# Altium PCB XPIMU_1V1.PCBDOC (part 1 of 3)
Units mil, origin at the board's own origin, x right, y up, seen from the top; angles counter-clockwise.
Board outline 1578.8 x 1145.73 mil, 6 copper layers (Top Layer, Internal Plane 1, Mid-Layer 1, Mid-Layer 2, Mid-Layer 3, Bottom Layer); 139 components, 101 nets, 532 pads, 256 vias.
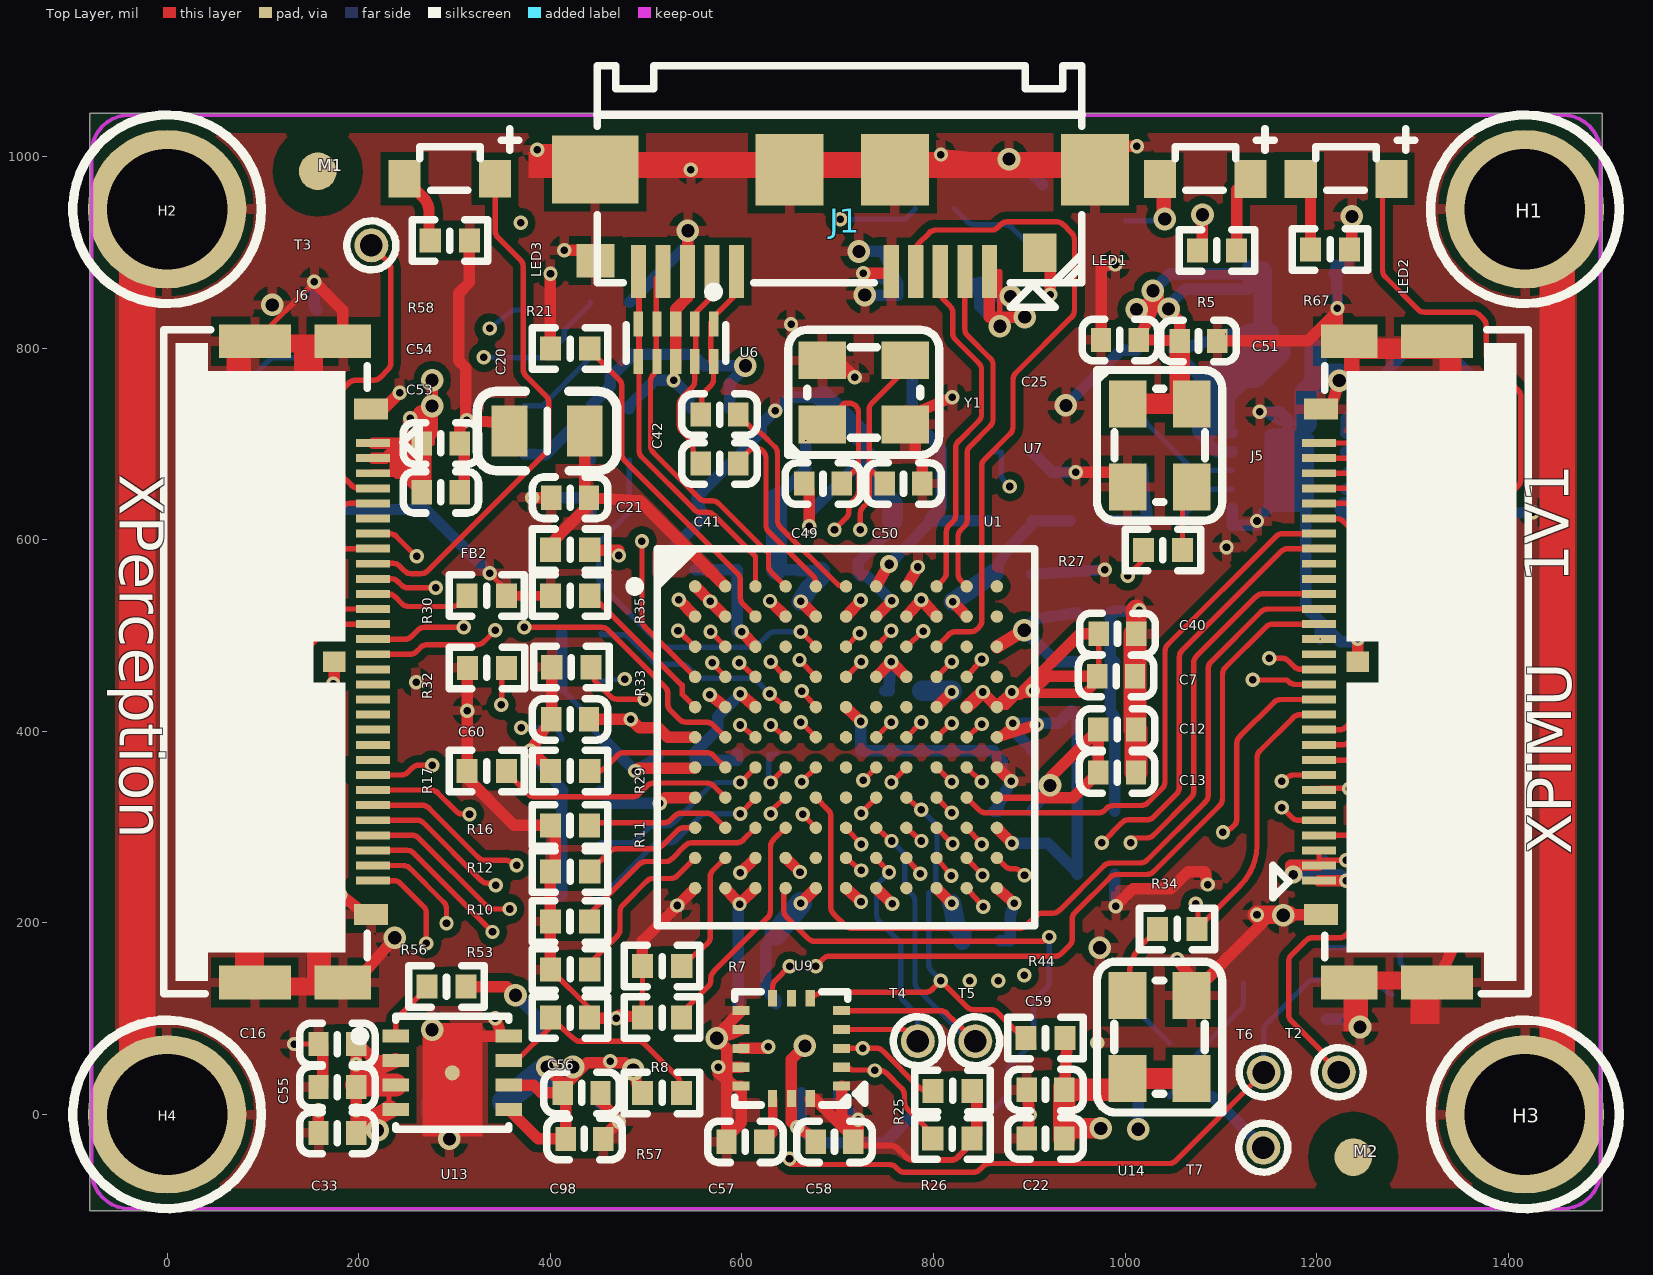
[diagram p0: Top Layer view]
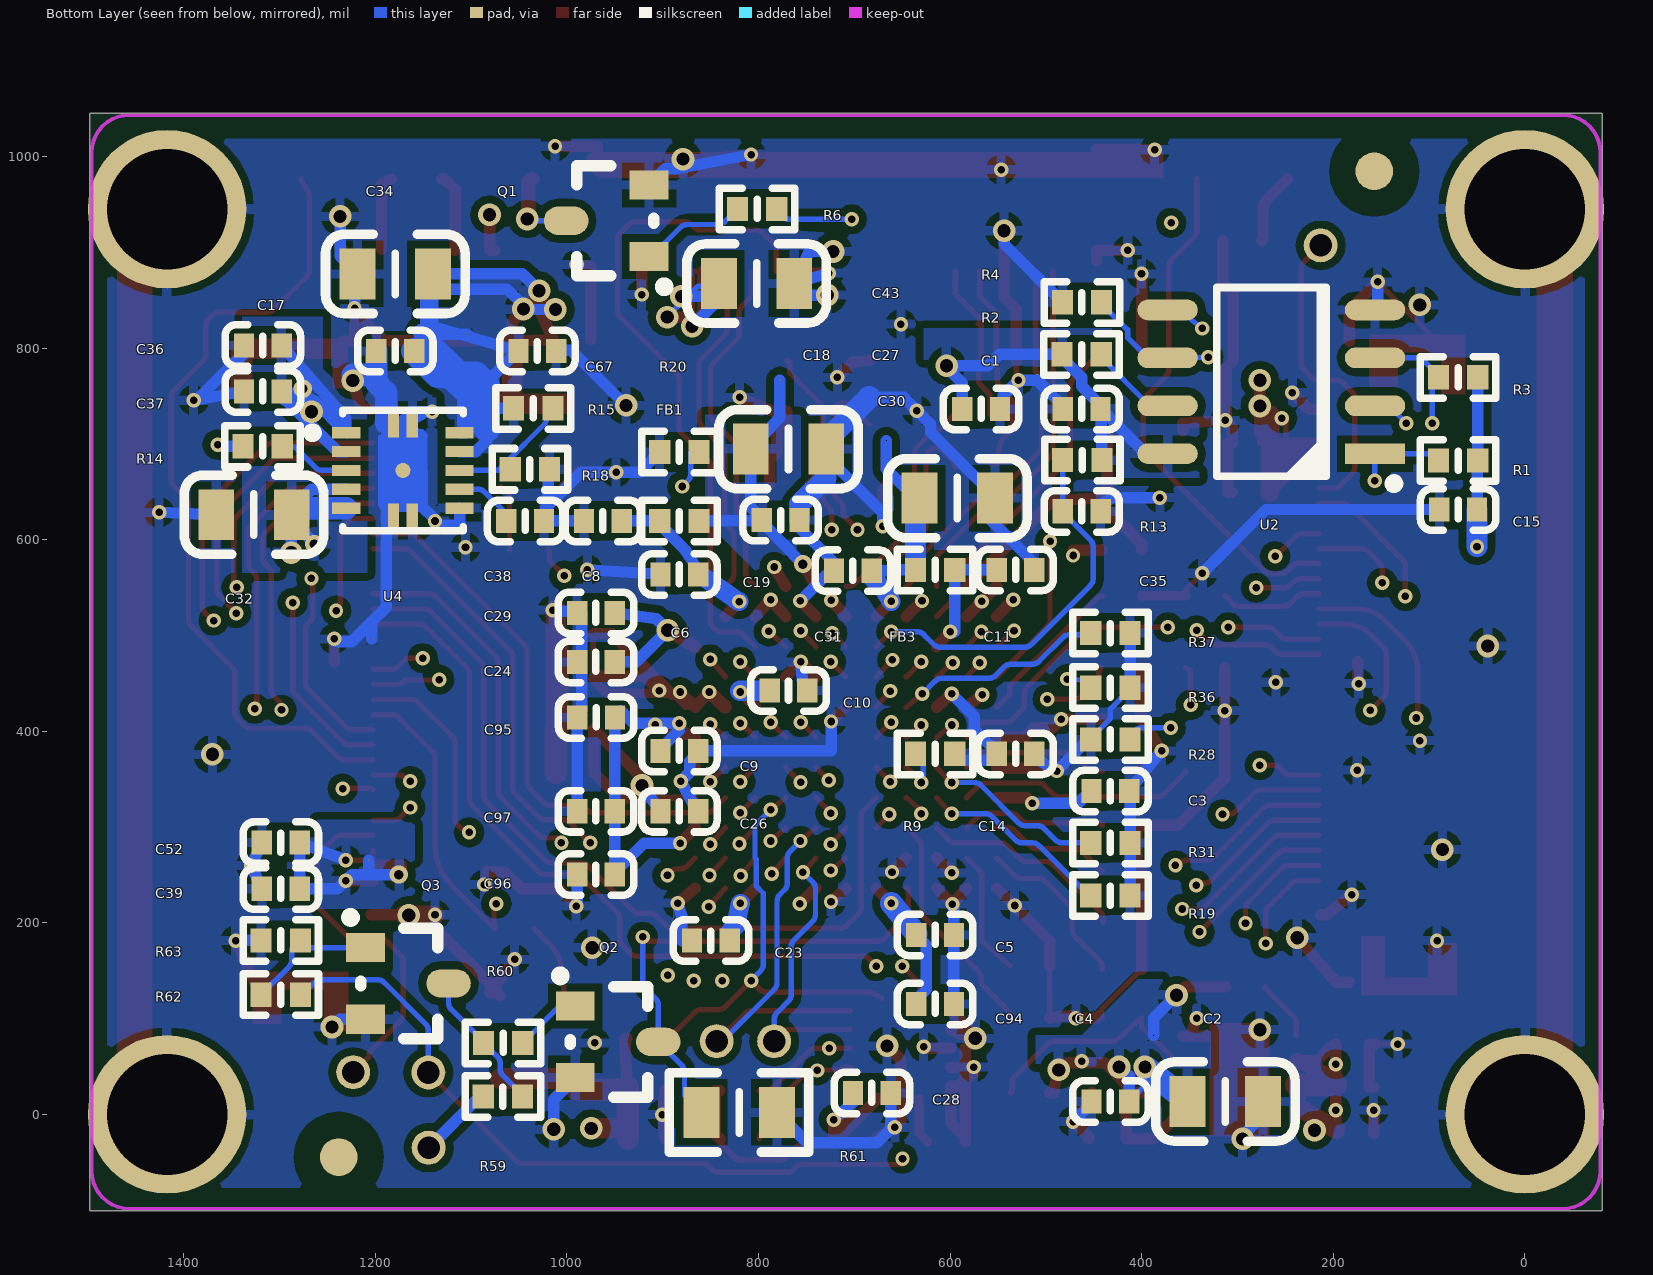
[diagram p1: Bottom Layer view, seen from below]
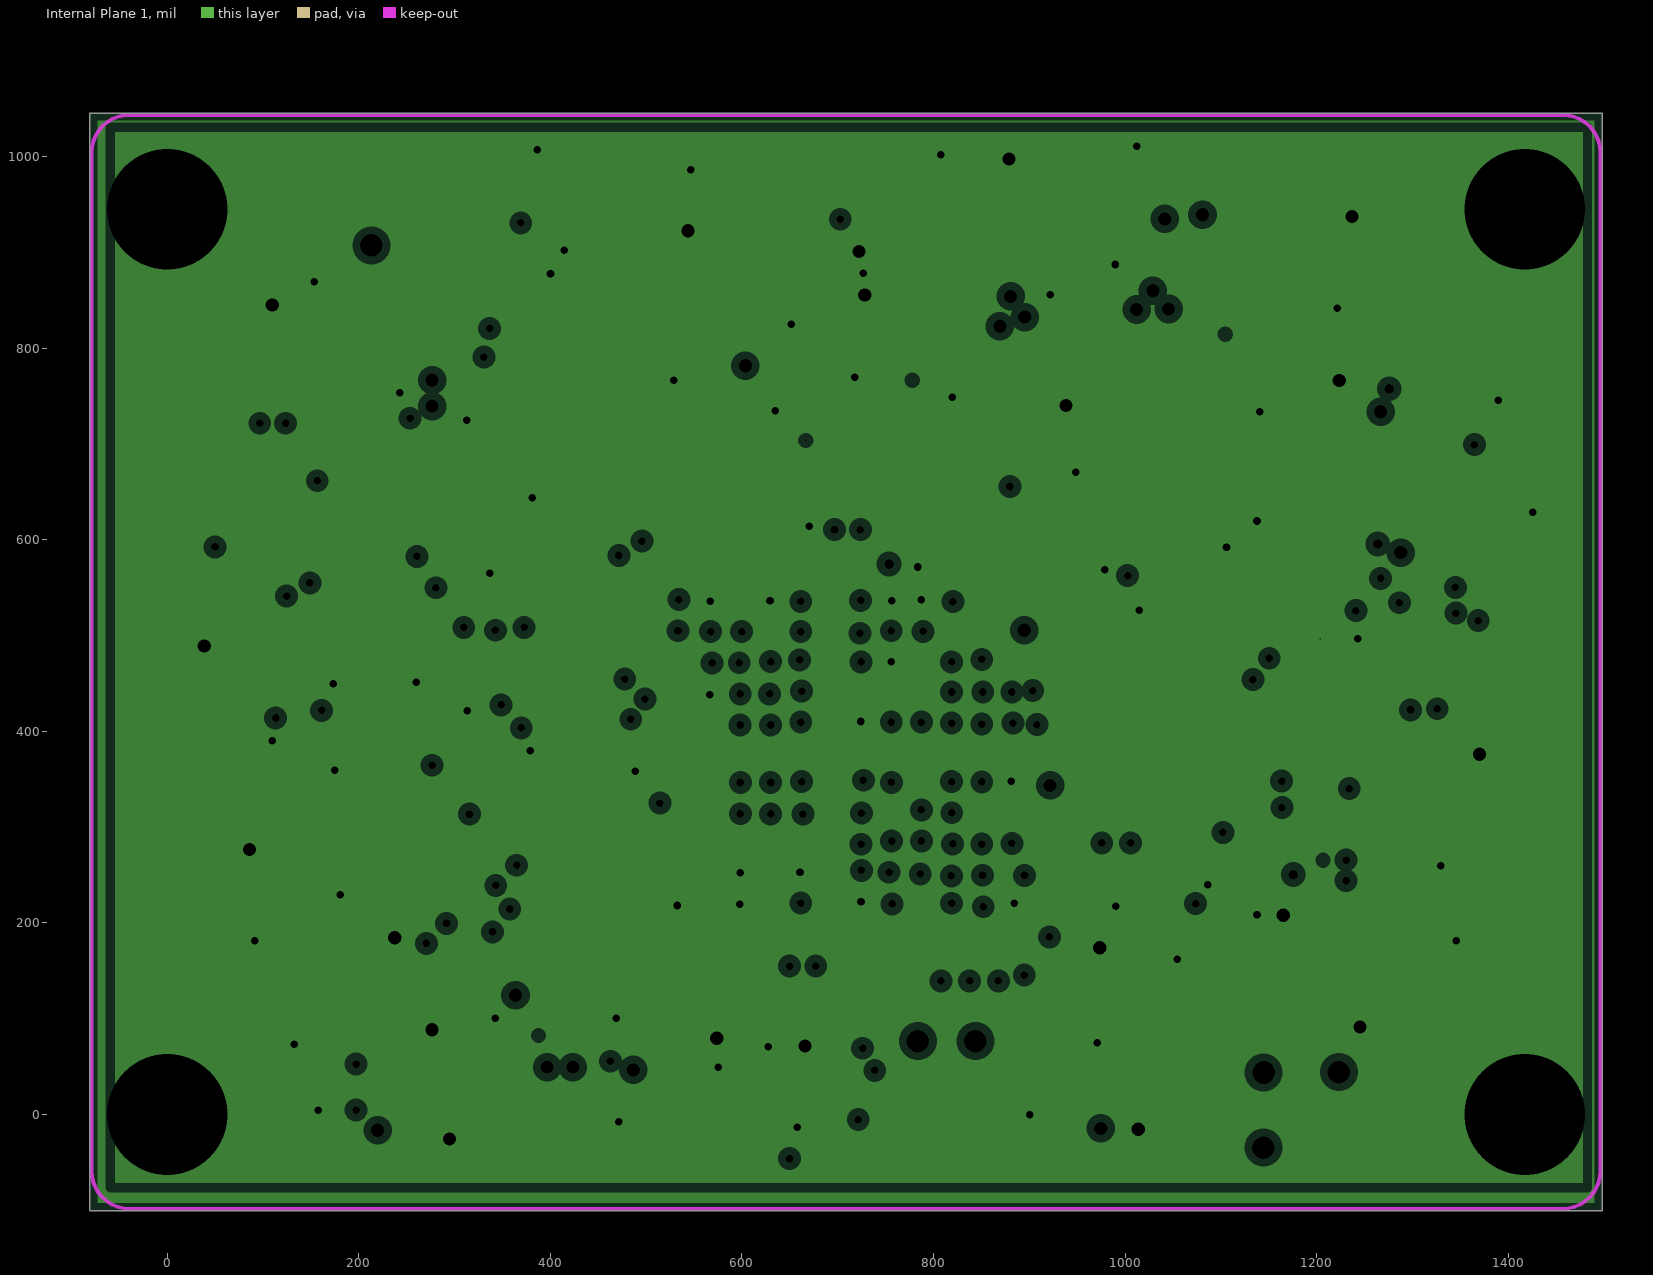
[diagram p2: Internal Plane 1, clearances drawn from the general rule]
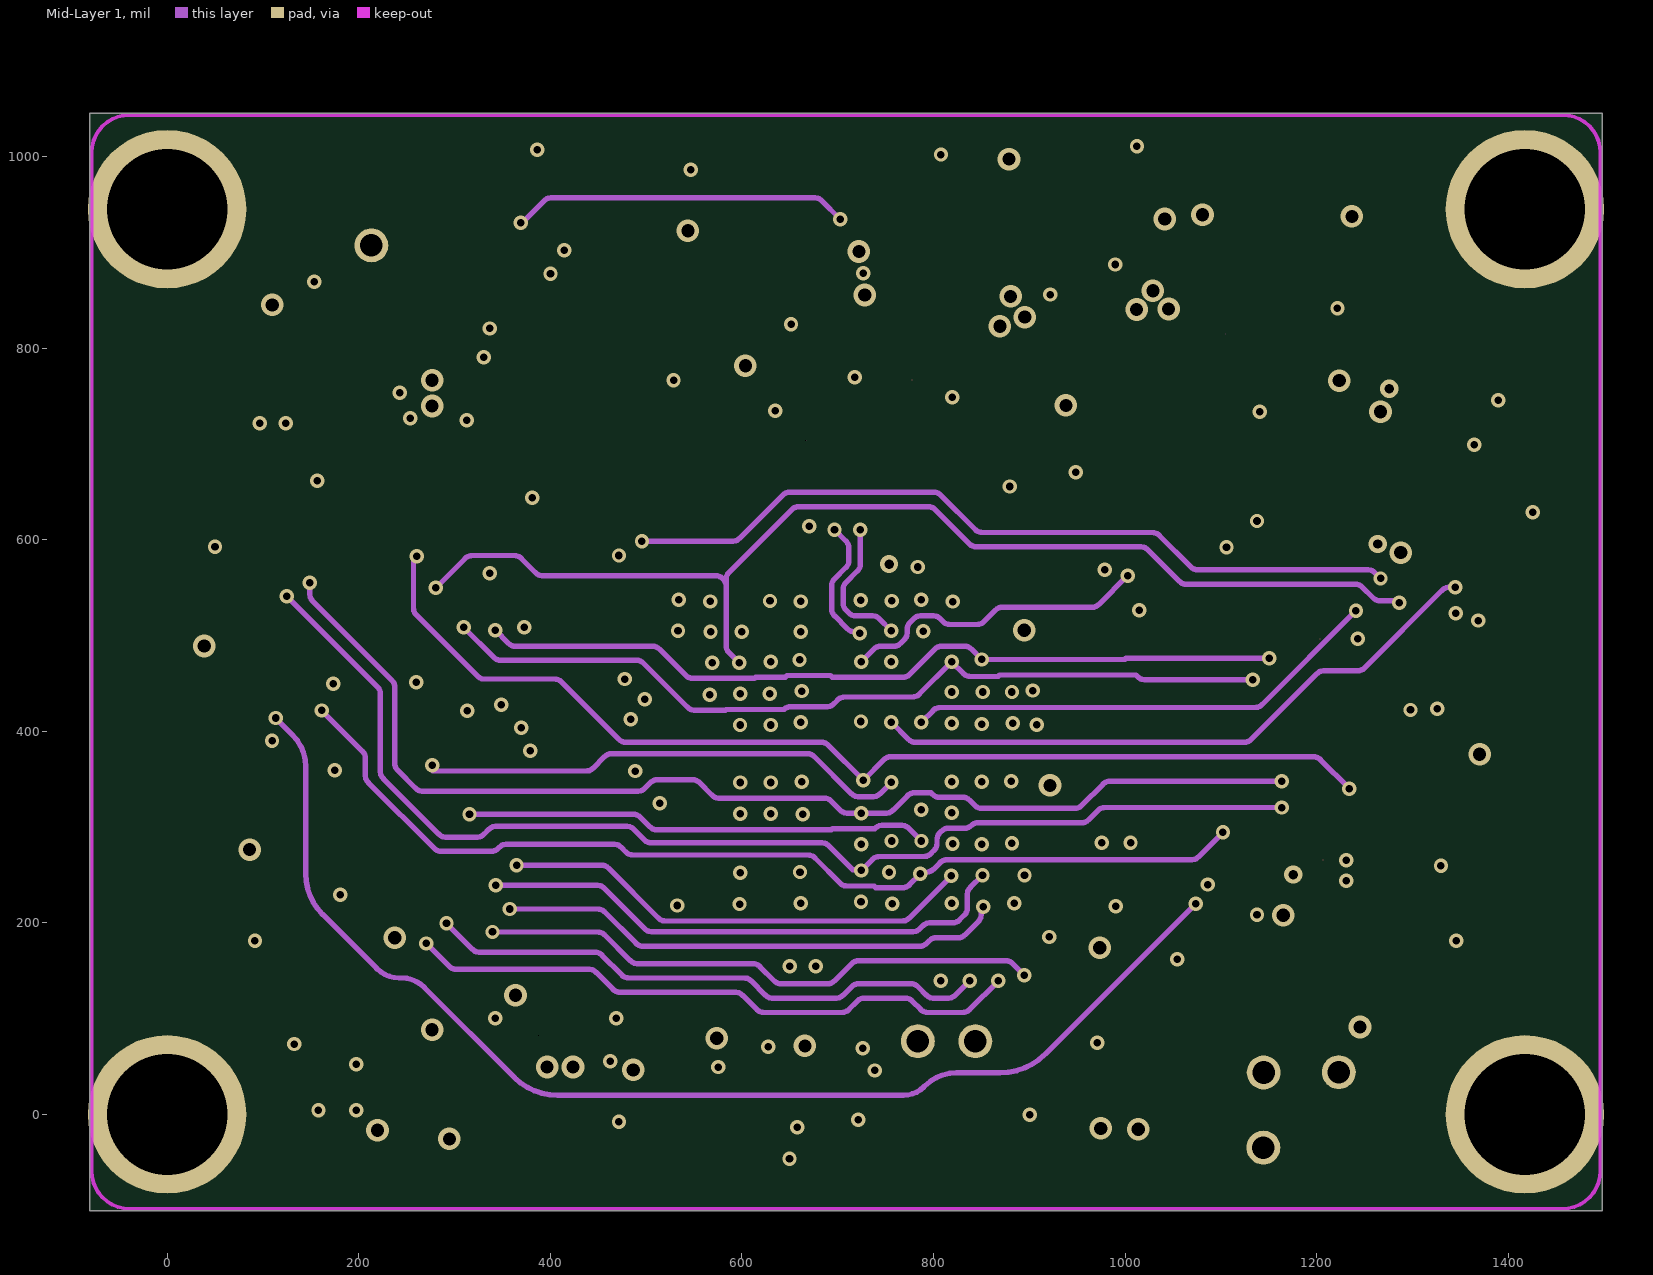
[diagram p3: Mid-Layer 1]
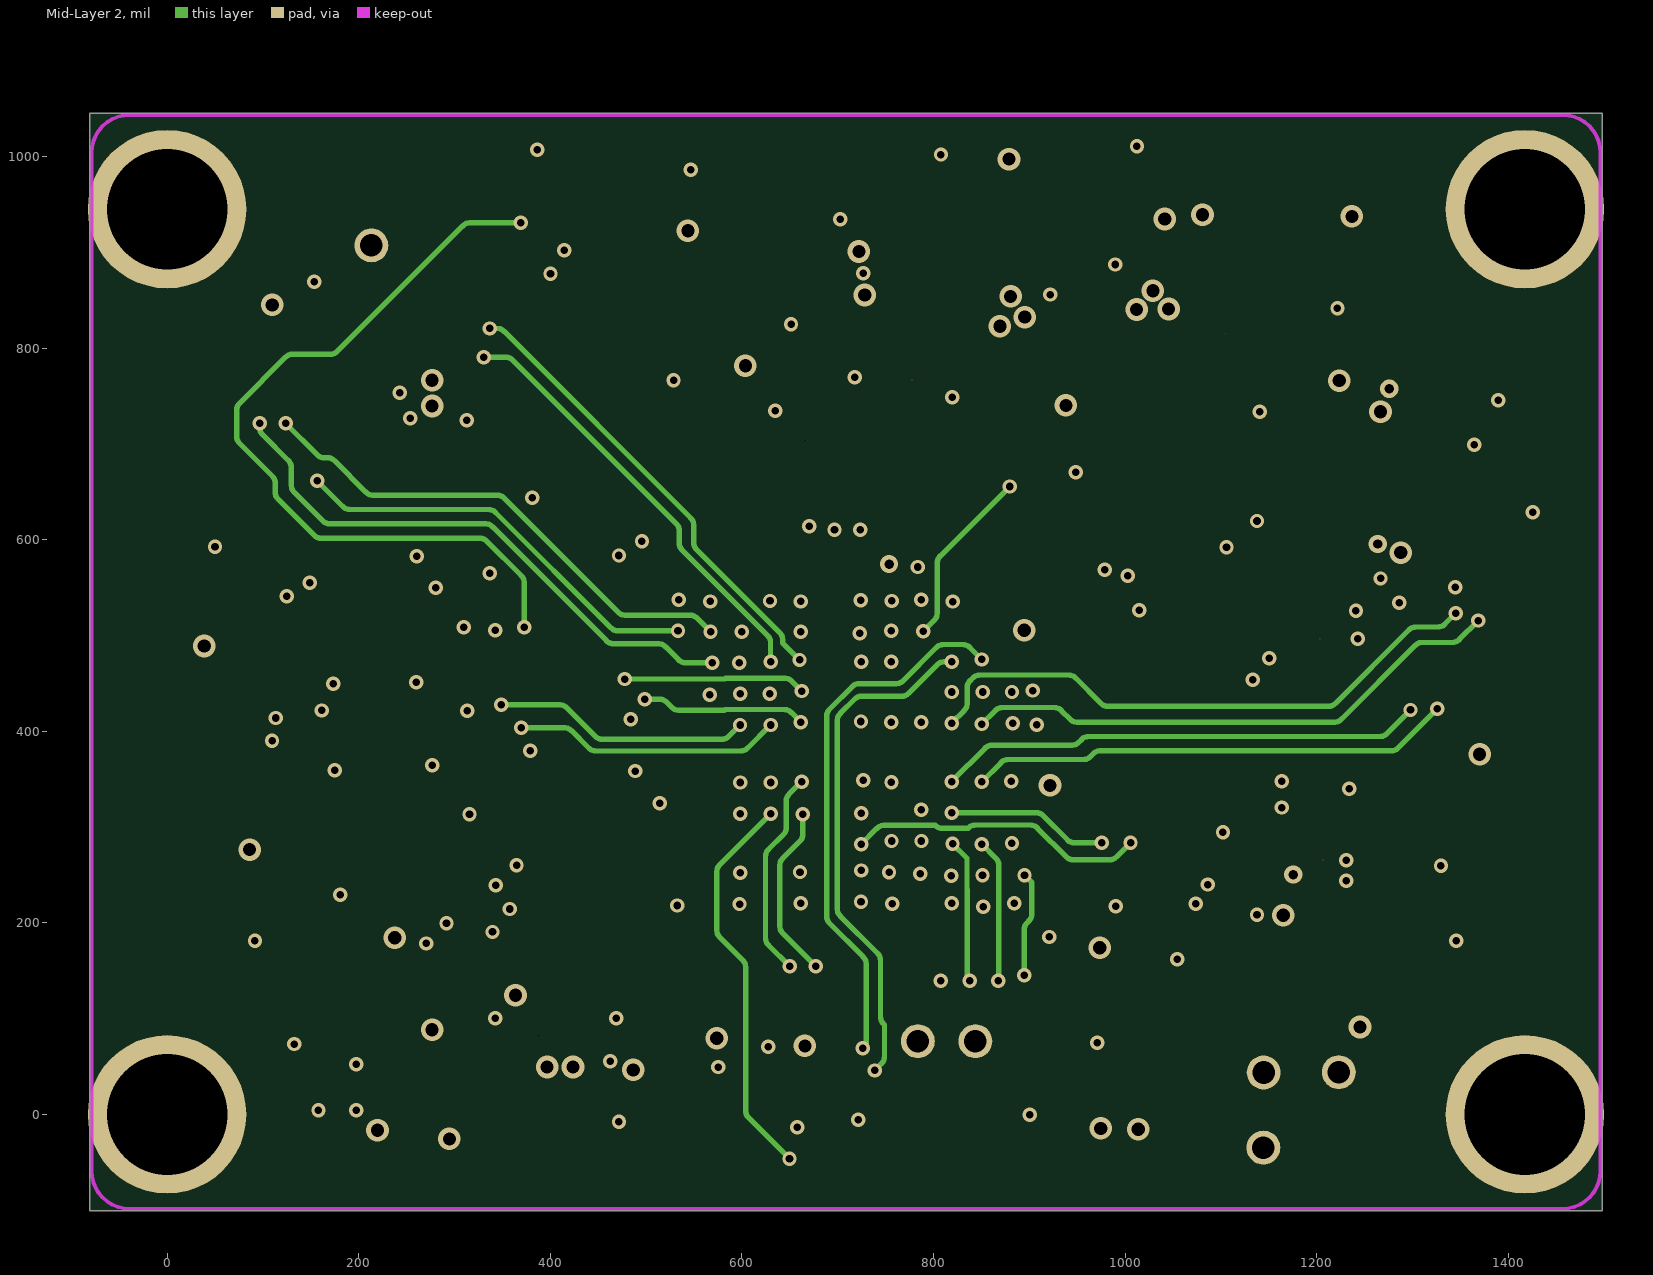
[diagram p4: Mid-Layer 2]
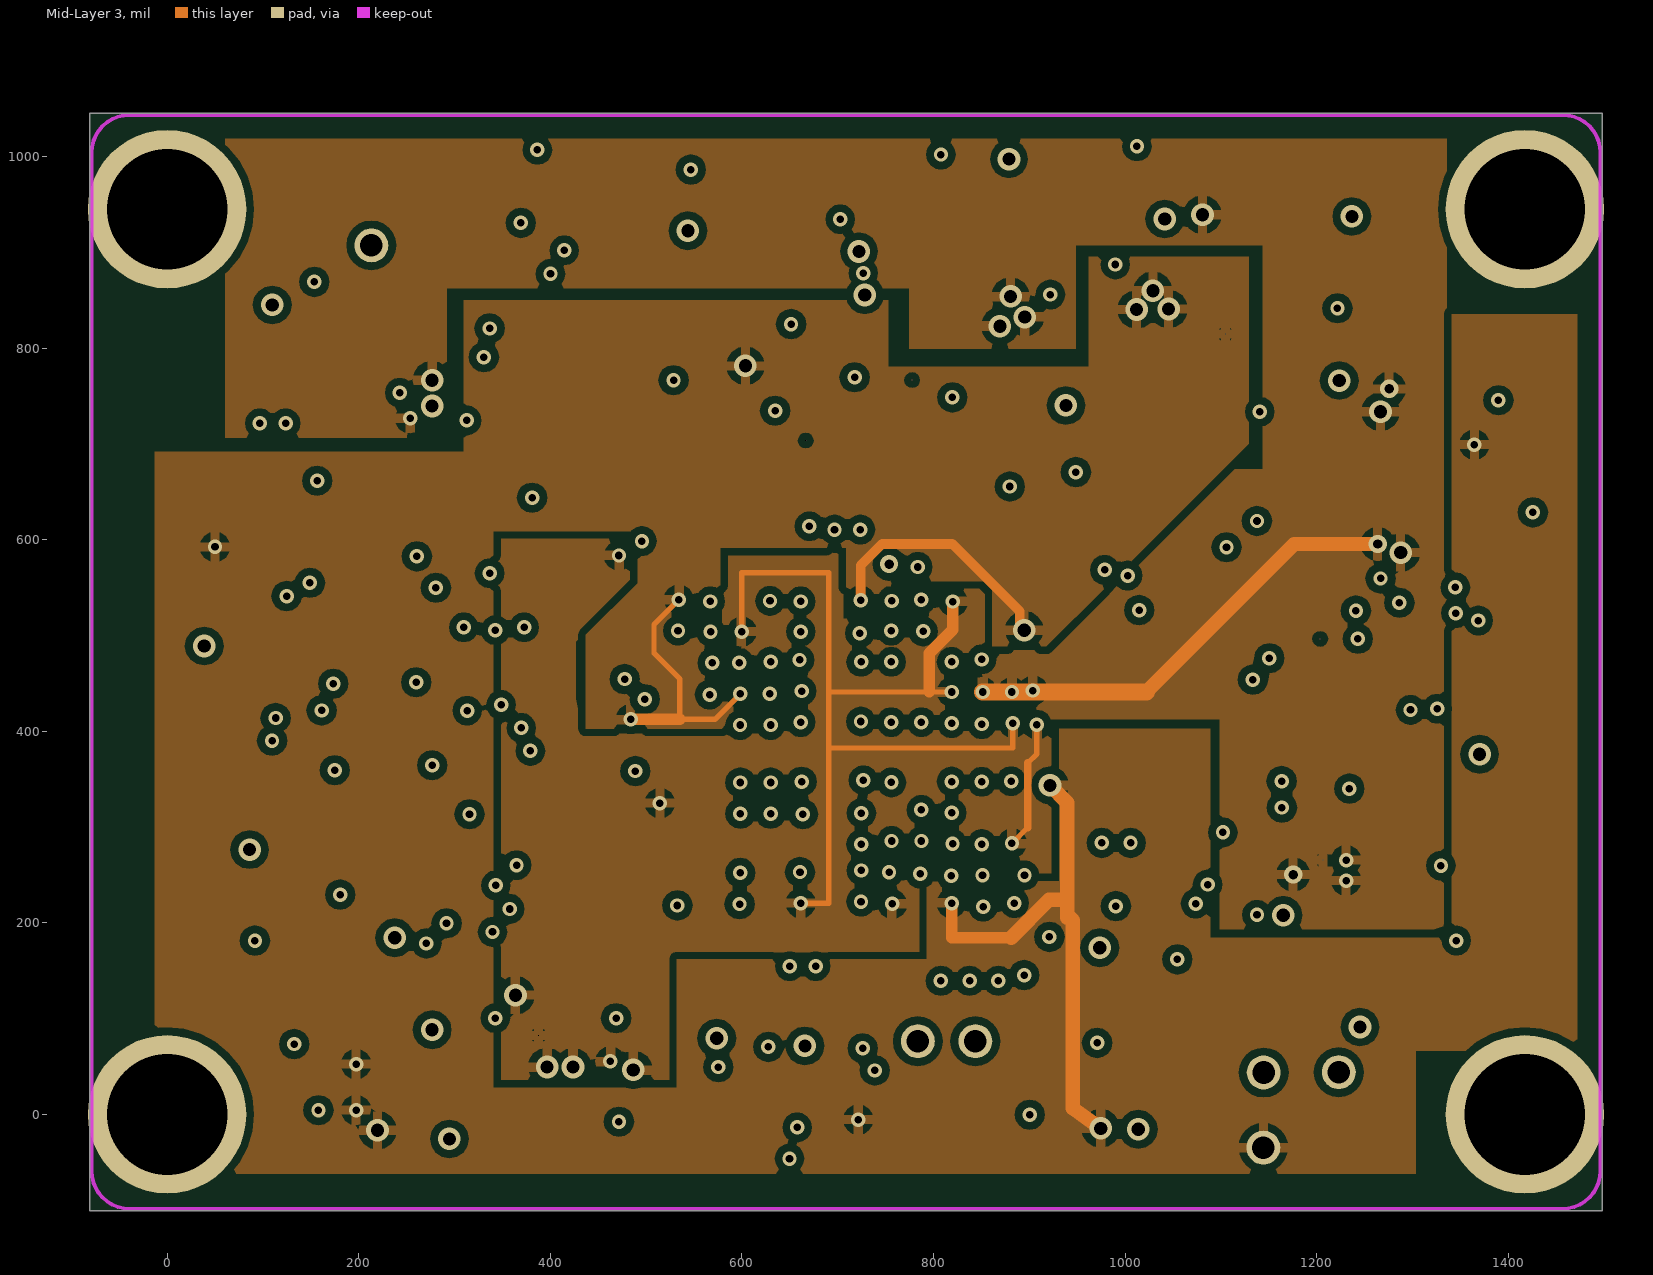
[diagram p5: Mid-Layer 3]

## Layer stack, top to bottom
Top Layer: signal copper 1.4
Dielectric: dielectric 12.6, FR-4, Dk 4.8
Internal Plane 1: plane copper 1.4
Dielectric: dielectric 12.6, FR-4, Dk 4.8
Mid-Layer 1: signal copper 1.4
Dielectric: dielectric 12.6, FR-4, Dk 4.8
Mid-Layer 2: signal copper 1.4
Dielectric: dielectric 12.6, FR-4, Dk 4.8
Mid-Layer 3: signal copper 1.4
Dielectric: dielectric 12.6, FR-4, Dk 4.8
Bottom Layer: signal copper 1.4

## Board outline
-80.74,-100.43 1498.06,-100.43 1498.06,1045.31 -80.74,1045.31

## Design rules (kind name [scope] priority, off if disabled: settings)
Clearance "'Default' PADS rule_9" [All] p1: gap=8
Clearance "'Default' PADS rule_8" [InPolygon vs InPolygon] p2: gap=8
Clearance "'Default' PADS rule_7" [All] p3: gap=5.5
Clearance "'Default' PADS rule_4" [IsVia vs IsVia] p4: gap=6
ComponentClearance "'Default' PADS rule" [All] p1: gap=10 collisioncheckmode=3 verticalgap=10 showdistances=FALSE
PlaneClearance "'Default' PADS rule_3" [All] p1: clearance=8
PlaneConnect "Power Plane Connect Style - pads with no thermal" [(Name='J5-31') Or (Name='J5-32') Or (Name='J6-31') Or (Name='J6-32') Or (Name='M1-1') Or (Name='M2-1') Or (Name='U1-FID1') Or (Name='U1-FID2')] p1: planeconnectstyle=NoConnect reliefexpansion=20 reliefentries=4 reliefconductorwidth=10 reliefairgap=10 // PAD - No Thermal Connect Rule
PlaneConnect "Power Plane Connect Style - from global settings" [All] p2: planeconnectstyle=Relief reliefexpansion=20 reliefentries=2 reliefconductorwidth=11.81 reliefairgap=10
PolygonConnect [All] p1: connectstyle=Relief reliefconductorwidth=10 reliefentries=4 polygonreliefangle="90 Angle"
RoutingVias [All] p1: holewidth=28 width=50 viastyle="Through Hole" minholewidth=28 minwidth=50 maxholewidth=28 maxwidth=50
SMDToCorner "'Default' PADS rule_5" [All] p1: distance=60000
SMDToPlane "'Default' PADS rule_6" [All] p1: distance=60000
SilkscreenOverComponentPads [All] p1: minsilkscreentomaskgap=10
SolderMaskExpansion [All] p1: expansion=4
Width "'Default' PADS rule_2" [All] p1: maxlimit=250 minlimit=5 preferedwidth=5.6
24 further rules are at their usual default settings.

## Components (designator, comment, footprint, x,y, rotation, side; value= is the part's Value field where it differs from the comment)
C1 "0402C_L" 0402C_L 462.66,736.44 r180 bottom
C2 "0805C" 0805C 312.66,13.44 r180 bottom
C3 "0402C_L" 0402C_L 432.66,337.44 r0 bottom
C4 "0402C_L" 0402C_L 432.66,13.44 r180 bottom
C5 "0402C_L" 0402C_L 615.66,187.44 r0 bottom
C6 "0402C_L" 0402C_L 882.65,563.78 r180 bottom
C7 "0402C_L" 0402C_L 990.66,457.44 r180 top
C8 "0402C_L" 0402C_L 962.53,619.44 r180 bottom
C9 "0402C_L" 0402C_L 882.66,379.44 r0 bottom
C10 "0402C_L" 0402C_L 768.66,442.44 r0 bottom
C11 "0402C_L" 0402C_L 531.66,568.44 r0 bottom
C12 "0402C_L" 0402C_L 991.65,401.84 r180 top
C13 "0402C_L" 0402C_L 991.65,356.84 r180 top
C14 "0402C_L" 0402C_L 531.66,376.44 r0 bottom
C15 "0402C_L" 0402C_L 69.66,631.44 r180 bottom
C16 "0402C_L" 0402C_L 177.66,73.44 r0 top
C17 "0402C_L" 0402C_L 1179.16,796.91 r180 bottom
C18 "0805C" 0805C 768.66,694.44 r180 bottom
C19 "0402C_L" 0402C_L 776.84,620.39 r0 bottom
C20 "0805C" 0805C 396.65,713.43 r180 top
C21 "0402C_L" 0402C_L 420.66,643.7 r0 top
C22 "0402C_L" 0402C_L 916.91,-25.22 r0 top
C23 "0402C_L" 0402C_L 849.66,181.44 r180 bottom
C24 "0402C_L" 0402C_L 969.66,472.44 r180 bottom
C25 "0402C_L" 0402C_L 994.56,808.44 r0 top
C26 "0402C_L" 0402C_L 882.66,316.44 r0 bottom
C27 "0402C_L" 0402C_L 567.66,736.44 r0 bottom
C28 "0402C_L" 0402C_L 681.66,22.44 r0 bottom
C29 "0402C_L" 0402C_L 969.66,523.53 r180 bottom
C30 "0805C" 0805C 592.44,643.25 r180 bottom
C31 "0402C_L" 0402C_L 701.56,567.54 r180 bottom
C32 "0805C" 0805C 1326.66,625.98 r0 bottom
C33 "0402C_L" 0402C_L 177.66,-19.56 r0 top
C34 "0805C" 0805C 1179.16,877.4 r180 bottom
C35 "0402C_L" 0402C_L 462.57,629.56 r0 bottom
C36 "0402C_L" 0402C_L 1317.39,802.67 r0 bottom
C37 "0402C_L" 0402C_L 1317.39,754.67 r180 bottom
C38 "0402C_L" 0402C_L 1043.6,619.44 r0 bottom
C39 "0402C_L" 0402C_L 1298.67,235.6 r180 bottom
C40 "0402C_L" 0402C_L 992.07,501.69 r0 top
C41 "0402C_L" 0402C_L 576.66,679.44 r180 top
C42 "0402C_L" 0402C_L 576.66,730.44 r180 top
C43 "0805C" 0805C 802.01,867.43 r0 bottom
C49 "0402C_L" 0402C_L 684.66,658.44 r0 top
C50 "0402C_L" 0402C_L 768.66,658.44 r0 top
C51 "0402C_L" 0402C_L 1076.64,807.38 r180 top
C52 "0402C_L" 0402C_L 1298.67,283.74 r180 bottom
C53 "0402C_L" 0402C_L 285.66,649.44 r180 top
C54 "0402C_L" 0402C_L 285.66,700.44 r180 top
C55 "0402C_L" 0402C_L 177.66,28.44 r180 top
C56 "0402C_L" 0402C_L 432.66,22.44 r0 top
C57 "0402C_L" 0402C_L 603.66,-28.56 r0 top
C58 "0402C_L" 0402C_L 696.66,-28.56 r0 top
C59 "0402C_L" 0402C_L 916.91,25.71 r0 top
C60 "0402C_L" 0402C_L 420.66,412.44 r0 top
C67 "0402C_L" 0402C_L 1030.89,796.91 r0 bottom
C94 "0402C_L" 0402C_L 615.66,115.44 r0 bottom
C95 "0402C_L" 0402C_L 969.5,414.44 r180 bottom
C96 "0402C_L" 0402C_L 969.66,250.44 r180 bottom
C97 "0402C_L" 0402C_L 969.66,316.44 r180 bottom
C98 "0402C_L" 0402C_L 435.66,-25.56 r180 top
FB1 "0402R_L" 0402R_L 882.66,619.44 r0 bottom
FB2 "0402R_L" 0402R_L 420.66,589.44 r0 top
FB3 "0402R_L" 0402R_L 615.66,568.44 r180 bottom
H1 "PAD_M3_D350_450" PAD_M3_D350_450 1417.32,944.88 r0 top
H2 "PAD_M3_D350_450" PAD_M3_D350_450 0,944.88 r0 top
H3 "PAD_M3_D350_450" PAD_M3_D350_450 1417.32,0 r0 top
H4 "PAD_M3_D350_450" PAD_M3_D350_450 0,0 r0 top
J1 "USB3_BA_P65L130W51H28" USB3_BA_P65L130W51H28 807.09,1043.31 r180 top
J5 "HSA30_P40L196W42H10_20525" HSA30_P40L196W42H10_20525 1260.66,472.44 r90 top
J6 "HSA30_P40L196W42H10_20525" HSA30_P40L196W42H10_20525 156.66,472.44 r270 top
LED1 "LED0805A_L210W100H60" LED0805A_L210W100H60 1083.56,976.47 r0 top
LED2 "LED0805A_L210W100H60" LED0805A_L210W100H60 1230.62,976.47 r0 top
LED3 "LED0805A_L210W100H60" LED0805A_L210W100H60 295.14,976.56 r0 top
M1 "PAD_MARK_D1-2" PAD_MARK_D1-2 157.25,984.5 r0 top
M2 "PAD_MARK_D1-2" PAD_MARK_D1-2 1238.18,-44.6 r0 top
Q1 "SOT-23L" SOT-23L 955.53,932.84 r0 bottom
Q2 "SOT-23L" SOT-23L 949.91,75.74 r180 bottom
Q3 "SOT-23L" SOT-23L 1168.82,136.73 r180 bottom
R1 "0402R_L" 0402R_L 69.66,682.44 r0 bottom
R2 "0402R_L" 0402R_L 462.66,793.44 r0 bottom
R3 "0402R_L" 0402R_L 69.66,769.44 r0 bottom
R4 "0402R_L" 0402R_L 462.36,847.73 r180 bottom
R5 "0402R_L" 0402R_L 1095.85,901.9 r0 top
R6 "0402R_L" 0402R_L 801.48,945.27 r0 bottom
R7 "0402R_L" 0402R_L 516.69,154.86 r180 top
R8 "0402R_L" 0402R_L 516.63,101.11 r180 top
R9 "0402R_L" 0402R_L 615.66,376.44 r0 bottom
R10 "0402R_L" 0402R_L 420.66,151.44 r180 top
R11 "0402R_L" 0402R_L 420.56,301.58 r180 top
R12 "0402R_L" 0402R_L 420.56,201.4 r180 top
R13 "0402R_L" 0402R_L 462.04,683.05 r0 bottom
R14 "0402R_L" 0402R_L 1317.66,697.44 r180 bottom
R15 "0402R_L" 0402R_L 1035.12,737.07 r180 bottom
R16 "0402R_L" 0402R_L 420.66,253.44 r180 top
R17 "0402R_L" 0402R_L 333.66,358.44 r180 top
R18 "0402R_L" 0402R_L 1038.66,673.44 r180 bottom
R19 "0402R_L" 0402R_L 432.66,228.35 r180 bottom
R20 "0402R_L" 0402R_L 882.66,691.44 r0 bottom
R21 "0402R_L" 0402R_L 420.66,799.44 r180 top
R25 "0402R_L" 0402R_L 819.93,24.54 r180 top
R26 "0402R_L" 0402R_L 819.67,-25.23 r180 top
R27 "0402R_L" 0402R_L 1039.48,589.04 r0 top
R28 "0402R_L" 0402R_L 432.66,391.44 r0 bottom
R29 "0402R_L" 0402R_L 420.66,358.44 r180 top
R30 "0402R_L" 0402R_L 333.66,541.44 r0 top
R31 "0402R_L" 0402R_L 432.66,283.46 r180 bottom
R32 "0402R_L" 0402R_L 333.88,466.18 r180 top
R33 "0402R_L" 0402R_L 422.02,466.84 r180 top
R34 "0402R_L" 0402R_L 1054.39,193.72 r180 top
R35 "0402R_L" 0402R_L 420.66,541.44 r180 top
R36 "0402R_L" 0402R_L 432.66,445.44 r180 bottom
R37 "0402R_L" 0402R_L 432.66,502.44 r180 bottom
R44 "0402R_L" 0402R_L 916.91,79.71 r0 top
R53 "0402R_L" 0402R_L 420.63,101.11 r0 top
R56 "0402R_L" 0402R_L 291.66,133.44 r180 top
R57 "0402R_L" 0402R_L 516.66,22.44 r0 top
R58 "0402R_L" 0402R_L 295.14,912.09 r180 top
R59 "0402R_L" 0402R_L 1066.89,18.62 r0 bottom
R60 "0402R_L" 0402R_L 1066.56,74.61 r0 bottom
R61 "0805R" 0805R 820.17,2.13 r0 bottom
R62 "0402R_L" 0402R_L 1298.67,124.97 r0 bottom
R63 "0402R_L" 0402R_L 1298.67,181.63 r180 bottom
R67 "0402R_L" 0402R_L 1213.94,902.96 r180 top
T2 "PAD_TP_D1.2" PAD_TP_D1.2 1223.05,44.09 r0 top
T3 "PAD_TP_D1.2" PAD_TP_D1.2 213.23,907.1 r0 top
T4 "PAD_TP_D1.2" PAD_TP_D1.2 783.66,76.44 r0 top
T5 "PAD_TP_D1.2" PAD_TP_D1.2 843.66,76.44 r0 top
T6 "PAD_TP_D1.2" PAD_TP_D1.2 1144.65,43.75 r0 top
T7 "PAD_TP_D1.2" PAD_TP_D1.2 1144.31,-34.65 r0 top
U1 "FBGA121_P80L100W100H11" FBGA121_P80L100W100H11 708.66,393.7 r0 top
U2 "SO8N_P127L50W40W62H17" SO8N_P127L50W40W62H17 264.66,764.74 r0 bottom
U4 "SON10_P50L32W32H10_DRC" SON10_P50L32W32H10_DRC 1171.16,672.24 r180 bottom
U6 "UDFN10_SON_P50L25W10H55" UDFN10_SON_P50L25W10H55 531.06,805.44 r270 top
U7 "XTAL_3225" XTAL_3225 1036.1,698.39 r270 top
U9 "LGA16_P50L30W30H08" LGA16_P50L30W30H08 651.66,68.9 r180 top
U13 "TDFN8_P65L30W30H08" TDFN8_P65L30W30H08 297.66,43.44 r0 top
U14 "XTAL_3225" XTAL_3225 1035.93,80.71 r90 top
Y1 "XTAL_3225" XTAL_3225 727.16,753.64 r0 top

## Footprints (in the part's own frame and the unit in brackets; to place one, negate y for a bottom-side part, rotate by r counter-clockwise, add the part's x,y. Pads: shape width x height; smd on the part's side, far side on the other; paste and mask are expansions set on the pad)
0402C_L [mm]
  rect 0.54x0.64 smd: 1(-0.5,0) 2(0.5,0)
  silkscreen extent -1,-0.55 1,0.55
0402R_L [mm]
  rect 0.56x0.64 smd: 1(-0.52,0) 2(0.52,0)
  silkscreen extent -1,-0.55 1,0.55
0805C [mm]
  rect 0.95x1.35 smd: 1(-1,0) 2(1,0)
  silkscreen extent -1.85,-1.05 1.85,1.05
0805R [mm]
  rect 0.95x1.35 smd: 1(-1,0) 2(1,0)
  silkscreen extent -1.85,-1.05 1.85,1.05
FBGA121_P80L100W100H11 [mm]
  round 0.33 smd: A1(-4,4) A2(-3.2,4) A3(-2.4,4) A4(-1.6,4) A5(-0.8,4) A6(0,4) A7(0.8,4) A8(1.6,4) A9(2.4,4) A10(3.2,4) A11(4,4) B1(-4,3.2) B2(-3.2,3.2) B3(-2.4,3.2) B4(-1.6,3.2) B5(-0.8,3.2) B6(0,3.2) B7(0.8,3.2) B8(1.6,3.2) B9(2.4,3.2) B10(3.2,3.2) B11(4,3.2) C1(-4,2.4) C2(-3.2,2.4) C3(-2.4,2.4) C4(-1.6,2.4) C5(-0.8,2.4) C6(0,2.4) C7(0.8,2.4) C8(1.6,2.4) C9(2.4,2.4) C10(3.2,2.4) C11(4,2.4) D1(-4,1.6) D2(-3.2,1.6) D3(-2.4,1.6) D4(-1.6,1.6) D5(-0.8,1.6) D6(0,1.6) D7(0.8,1.6) D8(1.6,1.6) D9(2.4,1.6) D10(3.2,1.6) D11(4,1.6) E1(-4,0.8) E2(-3.2,0.8) E3(-2.4,0.8) E4(-1.6,0.8) E5(-0.8,0.8) E6(0,0.8) E7(0.8,0.8) E8(1.6,0.8) E9(2.4,0.8) E10(3.2,0.8) E11(4,0.8) F1(-4,0) F2(-3.2,0) F3(-2.4,0) F4(-1.6,0) F5(-0.8,0) F6(0,0) F7(0.8,0) F8(1.6,0) F9(2.4,0) F10(3.2,0) F11(4,0) G1(-4,-0.8) G2(-3.2,-0.8) G3(-2.4,-0.8) G4(-1.6,-0.8) G5(-0.8,-0.8) G6(0,-0.8) G7(0.8,-0.8) G8(1.6,-0.8) G9(2.4,-0.8) G10(3.2,-0.8) G11(4,-0.8) H1(-4,-1.6) H2(-3.2,-1.6) H3(-2.4,-1.6) H4(-1.6,-1.6) H5(-0.8,-1.6) H6(0,-1.6) H7(0.8,-1.6) H8(1.6,-1.6) H9(2.4,-1.6) H10(3.2,-1.6) H11(4,-1.6) J1(-4,-2.4) J2(-3.2,-2.4) J3(-2.4,-2.4) J4(-1.6,-2.4) J5(-0.8,-2.4) J6(0,-2.4) J7(0.8,-2.4) J8(1.6,-2.4) J9(2.4,-2.4) J10(3.2,-2.4) J11(4,-2.4) K1(-4,-3.2) K2(-3.2,-3.2) K3(-2.4,-3.2) K4(-1.6,-3.2) K5(-0.8,-3.2) K6(0,-3.2) K7(0.8,-3.2) K8(1.6,-3.2) K9(2.4,-3.2) K10(3.2,-3.2) K11(4,-3.2) L1(-4,-4) L2(-3.2,-4) L3(-2.4,-4) L4(-1.6,-4) L5(-0.8,-4) L6(0,-4) L7(0.8,-4) L8(1.6,-4) L9(2.4,-4) L10(3.2,-4) L11(4,-4)
  round 1 on Mech16: FID1(-5.85,-5.85) FID2(5.85,5.85)
  silkscreen extent -5.72,-5 5,5
HSA30_P40L196W42H10_20525 [mm]
  rect 0.21x0.9 smd: 1(-5.8,1.48) 2(-5.4,1.48) 3(-5,1.48) 4(-4.6,1.48) 5(-4.2,1.48) 6(-3.8,1.48) 7(-3.4,1.48) 8(-3,1.48) 9(-2.6,1.48) 10(-2.2,1.48) 11(-1.8,1.48) 12(-1.4,1.48) 13(-1,1.48) 14(-0.6,1.48) 15(-0.2,1.48) 16(0.2,1.48) 17(0.6,1.48) 18(1,1.48) 19(1.4,1.48) 20(1.8,1.48) 21(2.2,1.48) 22(2.6,1.48) 23(3,1.48) 24(3.4,1.48) 25(3.8,1.48) 26(4.2,1.48) 27(4.6,1.48) 28(5,1.48) 29(5.4,1.48) 30(5.8,1.48)
  round 0 all layers, no hole: 31(-7.45,0) 32(7.45,0)
  rect 0.9x1.5 smd: 33(-8.5,0.68) 34(8.5,0.68)
  rect 0.9x1.9 smd: 35(8.5,-1.65) 36(-8.5,-1.65)
  rect 0.55x0.9 smd: 37(-6.7,1.43) 38(6.7,1.43)
  rect 0.55x0.6 smd: 39(0,0.45)
  silkscreen extent -8.8,-4.07 8.8,2.7
LED0805A_L210W100H60 [mm]
  rect 0.85x1 smd: 1(1.2,0) 2(-1.2,0)
  silkscreen extent -0.8,-0.3 1.83,1.33
LGA16_P50L30W30H08 [mm]
  rect 0.45x0.24 smd: 1(-1.33,1) 2(-1.33,0.5) 3(-1.33,0) 4(-1.33,-0.5) 5(-1.33,-1) 9(1.33,-1) 10(1.33,-0.5) 11(1.33,0) 12(1.33,0.5) 13(1.33,1)
  rect 0.24x0.45 smd: 6(-0.5,-1.33) 7(0,-1.33) 8(0.5,-1.33) 14(0.5,1.33) 15(0,1.33) 16(-0.5,1.33)
  silkscreen extent -1.95,-1.5 1.5,1.5
PAD_M3_D350_450 [mm]
  round 4.2 hole 3.2: 1(0,0)
  silkscreen extent -2.5,-2.5 2.5,2.5
PAD_MARK_D1-2 [mm]
  round 1 / inner round 0 / far side round 1 all layers, no hole mask+0.5: 1(0,0)
  Top Layer pour cut-out: 1.009,0 0.974,0.261 0.873,0.504 0.713,0.713 0.504,0.873 0.261,0.974 0,1.009 -0.261,0.974 -0.504,0.873 -0.713,0.713 -0.873,0.504 -0.974,0.261 -1.009,0 -0.974,-0.261 -0.873,-0.504 -0.713,-0.713 -0.504,-0.873 -0.261,-0.974 0,-1.009 0.261,-0.974 0.504,-0.873 0.713,-0.713 0.873,-0.504 0.974,-0.261 1.009,0
  Top Layer pour cut-out: 1.21,0 1.169,0.313 1.048,0.605 0.856,0.856 0.605,1.048 0.313,1.169 0,1.21 -0.313,1.169 -0.605,1.048 -0.856,0.856 -1.048,0.605 -1.169,0.313 -1.21,0 -1.169,-0.313 -1.048,-0.605 -0.856,-0.856 -0.605,-1.048 -0.313,-1.169 0,-1.21 0.313,-1.169 0.605,-1.048 0.856,-0.856 1.048,-0.605 1.169,-0.313 1.21,0
  Bottom Layer pour cut-out: 1.009,0 0.974,0.261 0.873,0.504 0.713,0.713 0.504,0.873 0.261,0.974 0,1.009 -0.261,0.974 -0.504,0.873 -0.713,0.713 -0.873,0.504 -0.974,0.261 -1.009,0 -0.974,-0.261 -0.873,-0.504 -0.713,-0.713 -0.504,-0.873 -0.261,-0.974 0,-1.009 0.261,-0.974 0.504,-0.873 0.713,-0.713 0.873,-0.504 0.974,-0.261 1.009,0
  Bottom Layer pour cut-out: 1.21,0 1.169,0.313 1.048,0.605 0.856,0.856 0.605,1.048 0.313,1.169 0,1.21 -0.313,1.169 -0.605,1.048 -0.856,0.856 -1.048,0.605 -1.169,0.313 -1.21,0 -1.169,-0.313 -1.048,-0.605 -0.856,-0.856 -0.605,-1.048 -0.313,-1.169 0,-1.21 0.313,-1.169 0.605,-1.048 0.856,-0.856 1.048,-0.605 1.169,-0.313 1.21,0
PAD_TP_D1.2 [mm]
  round 0.9 hole 0.6: 1(0,0)
  silkscreen extent -0.65,-0.65 0.65,0.65
SO8N_P127L50W40W62H17 [mm]
  rect 1.6x0.55 smd: 1(-2.75,1.905)
  oval 1.6x0.55 smd: 2(-2.75,0.635) 3(-2.75,-0.635) 4(-2.75,-1.905) 5(2.75,-1.905) 6(2.75,-0.635) 7(2.75,0.635) 8(2.75,1.905)
  silkscreen extent -3.37,-2.5 1.45,2.82
SON10_P50L32W32H10_DRC [mm]
  rect 0.75x0.3 smd: 1(-1.5,1) 2(-1.5,0.5) 3(-1.5,0) 4(-1.5,-0.5) 5(-1.5,-1) 6(1.5,-1) 7(1.5,-0.5) 8(1.5,0) 9(1.5,0.5) 10(1.5,1)
  round 0.4 smd: 11(0,0)
  rect 0.3x0.75 smd: 12(-0.25,1.25) 13(0.25,1.25) 14(-0.25,-1.25) 15(0.25,-1.25)
  Top Layer region: -0.65,0.9 -0.45,1.1 0.45,1.104 0.528,1.088 0.594,1.044 0.638,0.978 0.654,0.9 0.65,0.9 0.654,-0.9 0.638,-0.978 0.594,-1.044 0.528,-1.088 0.45,-1.104 0.45,-1.1 -0.45,-1.104 -0.528,-1.088 -0.594,-1.044 -0.638,-0.978 -0.654,-0.9 -0.65,-0.9 -0.65,0.9
  silkscreen extent -2.53,-1.6 1.6,1.6
SOT-23L [mm]
  rect 1.03x0.77 smd: 1(-1.05,0.95) 2(-1.05,-0.95)
  oval 1.18x0.75 smd: 3(1.15,0)
  silkscreen extent -1.57,-1.46 0.87,1.87
TDFN8_P65L30W30H08 [mm]
  rect 0.7x0.35 smd: 1(-1.5,0.975) 2(-1.5,0.325) 3(-1.5,-0.325) 4(-1.5,-0.975) 5(1.5,-0.975) 6(1.5,-0.325) 7(1.5,0.325) 8(1.5,0.975)
  round 0.4 smd: 9(0,0)
  Top Layer region: -0.675,0.6 -0.475,0.8 0.475,0.804 0.553,0.788 0.619,0.744 0.663,0.678 0.679,0.6 0.675,0.6 0.679,-0.6 0.663,-0.678 0.619,-0.744 0.553,-0.788 0.475,-0.804 0.475,-0.8 -0.475,-0.804 -0.553,-0.788 -0.619,-0.744 -0.663,-0.678 -0.679,-0.6 -0.675,-0.6 -0.675,0.6
  silkscreen extent -2.57,-1.5 1.5,1.5
UDFN10_SON_P50L25W10H55 [mm]
  rect 0.66x0.25 smd: 1(-0.5,1) 2(-0.5,0.5) 4(-0.5,-0.5) 5(-0.5,-1) 6(0.5,-1) 7(0.5,-0.5) 9(0.5,0.5) 10(0.5,1)
  rect 0.66x0.3 smd: 3(-0.5,0) 8(0.5,0)
  silkscreen extent -1.47,-1.32 0.48,1.32
USB3_BA_P65L130W51H28 [mm]
  rect 0.4x1.4 smd: 1(-1.3,4.15) 2(-0.65,4.15) 3(0,4.15) 4(0.65,4.15) 5(1.3,4.15) 6(5.4,4.15) 7(6.05,4.15) 8(6.7,4.15) 9(7.35,4.15) 10(8,4.15)
  rect 1.8x1.9 smd: 11(-4.1,1.45) 13(1.2,1.45) 14(4,1.45)
  rect 2.3x1.8 smd: 12(9.15,1.45)
  rect 0.889x1.016 smd: 15(-2.642,3.658)
  rect 1.016x0.889 smd: 16(9.144,3.861)
  silkscreen extent -3.75,-1.3 9.1,5.1
XTAL_3225 [mm]
  rect 1.25x1 smd: 1(-1.1,-0.85) 2(1.1,-0.85) 3(1.1,0.85) 4(-1.1,0.85)
  silkscreen extent -2,-1.66 2,1.66

## Via types
v1: diameter 15, hole 7.87, Top Layer to Bottom Layer, 205 vias
v2: diameter 23.62, hole 13.78, Top Layer to Bottom Layer, 41 vias
v3: diameter 0, hole 0, Top Layer to Bottom Layer, 6 vias
v4: diameter 19, hole 9.84, Top Layer to Bottom Layer, 4 vias

## Nets (pads, with @x,y where several pads share a name; then routed paths per layer and width w, separated by ;. In a path a pad name is that pad's centre, name@x,y a point inside that pad or via, vN(x,y) a via of type N, cw(c..) or ccw(c..) an arc to the next point about the centre after c; other vN are vias at no path point)
1V2: C2.1 C3.2 C4.2 C5.2 C6.2 C8.2 C9.2 C10.2 C11.2 C56.1 C94.2 C95.2 C96.2 C97.2 C98.2 FB1.2 FB2.2 FB3.2 R56.1 R57.1 U1.B10 U1.C3 U1.E9 U1.F11 U1.H1 U1.J11 U1.L5 U1.L7 U13.5 U13.6 | length 2828.3
  Top Layer w5.6: U1.F11@866.14,393.7 v1(882.87,408.47)
  Top Layer w12: R56.1@312.13,133.44 354.66,133.44 v2(363.66,124.44) ; U13.5@356.72,5.06 387.33,-25.56 C98.2@415.98,-25.56 415.98,22.44 C56.1@412.98,22.44 ; U13.6@356.72,30.65 382.5,30.65 390.35,22.8 390.35,22.44 C56.1@412.98,22.44 ; v2(396.66,49.44) 398.74,47.37 398.74,46.01 412.98,31.77 C56.1@412.98,28.44 ; FB2.2@441.13,589.44 441.13,588.9 471.66,588.9 v1(471.66,583.44) ; R57.1@496.19,22.44 491.17,22.44 491.17,29.04 487.39,43.63 487.39,44.66 477.92,54.13 438.66,54.13 C56.1@412.98,28.44 ; v1(514.42,324.94) 520.19,330.71 U1.H1@551.18,330.71 ; v1(599.75,503.94) U1.C3@614.17,488.19 ; v1(661.42,220.53) U1.L5@677.17,236.22 ; U1.L7@740.16,236.22 v1(756.8,219.81) ; U1.E9@803.15,425.2 v1(818.9,440.94) ; v1(820.21,535.34) U1.B10@834.65,519.69 ; U1.J11@866.14,299.21 v1(881.89,282.93) ; U1.F11@866.14,393.7 v1(907.88,406.83) ; C56.1@412.98,22.44 C56.1@412.98,28.44
  Mid-Layer 3 w5.6: v1(599.75,503.94) 599.75,565.44 690.66,565.44 690.66,440.94 ; v1(661.42,220.53) 690.66,220.53 690.66,382.44 ; v1(818.9,440.94) 795.66,440.94 690.66,440.94 ; v1(881.89,282.93) 898.39,299.43 ; v1(882.87,408.47) 882.87,382.44 690.66,382.44 ; 898.39,366.95 907.88,376.44 v1(907.88,406.83) ; 690.66,382.44 690.66,440.94
  Mid-Layer 3 w7.87: 898.39,299.43 898.39,366.95
  Mid-Layer 3 w12: 795.66,440.94 795.66,481.44 820.21,505.99 v1(820.21,535.34)
  Bottom Layer w5.6: 397.14,34.44 397.14,29.77 412.98,13.93 C4.2@412.98,13.44
  Bottom Layer w12: v2(363.66,124.44) 387.66,100.44 v3(387.66,82.44) ; v2@394.66,47.83 v2(396.66,49.44) 397.14,48.96 397.14,34.44 ; C4.2@412.98,13.44 412.98,40.44 414.66,40.44 v2(423.66,49.44) ; C3.2@452.35,337.44 453.66,337.44 466.16,324.94 v1(514.42,324.94) ; C11.2@551.35,568.44 FB3.2@595.19,568.44 595.19,503.94 v1(599.75,503.94) ; C94.2@635.35,115.44 635.35,119.76 624.66,130.44 624.66,176.76 C5.2@635.35,187.44 C5.2@635.35,188.32 ; C10.2@788.35,442.31 C10.2@788.35,442.44 ; v1(818.9,440.94) v1@818.9,442.31 ; C6.2@862.98,565.06 C6.2@862.97,563.78 867.61,568.44 867.61,575.04 876.66,589.44 903.66,616.44 FB1.2@903.13,619.44 C8.2@942.85,619.44 ; v1(881.89,282.93) 919.45,282.93 949.98,252.41 C96.2@949.98,250.44 C97.2@949.98,316.44 C95.2@949.81,414.44 943.63,421.44 930.66,408.47 v1(882.87,408.47) 882.87,400.89 902.35,381.41 C9.2@902.35,379.44
  Bottom Layer w19.68: v1(820.21,535.34) C6.2@862.98,565.06
  Bottom Layer w21.65: C10.2@788.35,442.31 v1@818.9,442.31
  Bottom Layer w23.62: C5.2@635.35,188.32 v1(661.42,220.53)
  Bottom Layer w25.59: C2.1@352.03,13.44 v2@394.66,47.83
  other v1: 462.66,55.44
  other v2: 486.66,46.44
1V2_AVDD: C18.1 C19.2 FB1.1 U1.A7 | length 319
  Top Layer w12: U1.A7@740.16,551.18 v4(753.66,574.44)
  Bottom Layer w12: v4(753.66,574.44) 796.53,618.56 C19.2@796.53,620.39 ; v3(777.66,766.44) 777.66,727.44 C18.1@808.03,694.44 808.03,633.87 796.53,622.36 C19.2@796.53,620.39 ; FB1.1@862.19,619.44 797.48,619.44 C19.2@796.53,620.39
1V2_U3RX: C20.1 C21.2 FB2.1 U1.A2 | length 332.6
  Top Layer w12: FB2.1@400.19,589.44 400.19,595.44 410.43,605.68 410.43,606.2 444.66,640.44 C21.2@440.35,643.7 ; C20.1@436.02,713.43 436.03,640.44 C21.2@440.35,643.7 ; U1.A2@582.68,551.18 493.42,640.44 C21.2@440.35,643.7
1V2_U3TX: C30.1 C31.2 FB3.1 U1.B5 | length 264.3
  Top Layer w12: v1(661.42,535.43) U1.B5@677.17,519.69
  Bottom Layer w12: FB3.1@636.13,568.44 659.16,568.44 659.24,568.36 659.24,567.54 C31.2@681.87,567.54 ; C30.1@636.13,643.24 C30.1@631.81,643.25 636.24,645.57 638.44,645.57 666.66,673.78 v3(666.66,703.44)
  Bottom Layer w19.68: v1(661.42,535.43) 669.4,548.31 681.87,560.77 C31.2@681.87,567.54
  Bottom Layer w21.65: FB3.1@636.13,568.44 C30.1@636.13,643.24
3V3: C1.2 C12.2 C13.2 C14.2 C15.2 C16.2 C17.2 C22.2 C23.2 C24.2 C25.2 C26.2 C27.2 C28.2 C29.2 C33.2 C34.2 C51.2 C55.1 C58.2 C59.2 C60.2 C67.2 R1.1 R2.2 R3.1 R9.1 R13.1 R14.1 R15.1 R25.1 R26.1 R44.2 R59.2 T7.1 U1.B1 U1.B6 U1.C11 U1.E3 U1.F1 U1.H11 U1.L9 U2.8 U4.9 U4.10 U7.1 U7.4 U9.1 U9.16 U13.2 U13.3 U13.4 U14.1 U14.4 | length 4956.6
  Top Layer w5.6: C55.1@197.16,37.77 197.3,30.62 C55.1@197.35,28.44 ; U13.4@238.61,5.06 232.33,5.06 231.66,5.06 231.66,30.65 U13.3@238.61,30.65 ; R26.1@840.14,-25.58 R26.1@840.14,-25.23 ; 900.66,330.71 908.93,330.71 v2(921.66,343.44)
  Top Layer w6.3: C58.2@716.35,-28.56 716.35,-30.53 718.24,-32.42 C58.2@719.2,-32.42 ; C58.2@721.47,-26.22 719.2,-28.49 C58.2@719.2,-32.42 ; C58.2@719.2,-32.42 754.77,-32.42 ; 754.77,-32.42 cw(c754.77,-43.44) 762.56,-35.65 ; 754.77,-32.42 cw(c754.77,-43.44) 762.56,-35.65 ; 762.56,-35.65 771.29,-44.37 ; 771.29,-44.37 ccw(c779.08,-36.58) 779.08,-47.6 ; 771.29,-44.37 ccw(c779.08,-36.58) 779.08,-47.6 ; 779.08,-47.6 818.1,-47.6 ; 818.1,-47.6 ccw(c818.1,-36.58) 825.89,-44.37 ; 818.1,-47.6 ccw(c818.1,-36.58) 825.89,-44.37 ; 825.89,-44.37 R26.1@836.91,-33.36 ; R26.1@836.91,-33.36 ccw(c829.12,-25.56) 840.14,-25.58 cw(c829.12,-25.56) R26.1@836.91,-33.36
  Top Layer w6.8: U1.H11@866.14,330.71 900.66,330.71
  Top Layer w12: C33.2@197.35,-15.71 C33.2@197.35,-19.56 v1(197.35,4.44) ; C55.1@197.35,28.44 v1(197.35,4.44) ; v1(197.35,52.44) C16.2@197.35,71.24 ; U13.4@232.33,5.06 U13.4@238.61,5.06 ; U13.2@238.61,56.24 216.66,56.24 201.66,71.24 C16.2@197.35,71.24 ; C60.2@440.35,412.44 v1(483.92,412.44) 492.79,403.57 512.79,403.57 522.66,393.7 U1.F1@551.18,393.7 ; v1(534.26,537.39) U1.B1@551.18,519.69 ; v1(598.31,438.95) U1.E3@614.17,425.2 ; U9.16@671.35,16.54 675.57,16.54 C58.2@715.5,-23.4 ; U9.1@704.02,29.53 704.02,-1.56 714.66,-12.2 714.66,-22.56 C58.2@715.5,-23.4 ; U1.B6@708.66,519.69 v1(723.95,536.63) ; C58.2@716.35,-28.56 716.35,-24.24 C58.2@715.5,-23.4 ; C58.2@721.47,-26.22 v1(721.47,-5.47) ; U1.L9@803.15,236.22 v1(818.9,220.47) ; R26.1@840.14,-25.58 845.16,-20.56 845.16,24.54 R25.1@840.4,24.54 ; 908.93,330.71 945.83,330.71 C13.2@971.96,356.84 C12.2@971.96,401.84 921.66,351.54 v2(921.66,343.44) ; C22.2@936.6,-25.22 939.7,-18.64 C22.2@943.79,-14.56 ; C59.2@936.6,25.71 936.78,25.9 C59.2@936.78,28.92 ; C59.2@936.6,28.74 C59.2@936.78,28.92 ; R44.2@937.38,79.71 939.7,78.91 C59.2@936.78,28.92 ; U14.4@988.92,25.7 U14.4@1002.47,37.4 ; v2(1012.03,840.21) 1034.35,853.44 C25.2@1014.24,808.44 C51.2@1056.95,807.38 1056.95,827.65 1045.39,839.21 v2(1045.39,840.74) ; U7.4@1056.95,746.2 1068.73,746.2 1068.78,746.16 1068.78,744.57 1068.2,744 U7.4@1069.56,741.7 ; v1(197.35,4.44) C16.2@197.35,73.44 C16.2@197.35,71.24
  Top Layer w13.78: U1.C11@866.14,488.19 v2(894.66,505.44)
  Top Layer w15.75: C55.1@197.16,37.77 U13.2@238.61,56.24
  Top Layer w19.68: C33.2@197.35,-15.71 U13.4@232.33,5.06
  Top Layer w21.65: C22.2@943.79,-14.56 v2(974.56,-14.56) ; U14.4@1002.47,37.4 U14.1@1069.4,37.4 ; U7.1@1002.63,741.7 U7.4@1069.56,741.7 ; U7.4@1056.95,746.2 C51.2@1056.95,807.38
  Top Layer w23.62: C55.1@197.33,30.65 U13.3@238.61,30.65 ; C22.2@936.6,-25.22 C59.2@936.6,28.74 ; C59.2@936.6,25.71 U14.4@988.92,25.7
  Mid-Layer 3 w5.6: v1(534.26,537.39) 508.31,511.44 508.31,481.44 535.31,454.44 535.31,412.44 571.8,412.44 v1(598.31,438.95)
  Mid-Layer 3 w10: v1(723.95,536.63) 723.95,573.01 746.38,595.44 819.66,595.44 890.16,524.94 890.16,509.94 v2(894.66,505.44)
  Mid-Layer 3 w11.81: v1(483.92,412.44) 535.31,412.44
  Mid-Layer 3 w12: v1(818.9,220.47) 818.9,184.44 881.02,184.44
  Mid-Layer 3 w15: 881.02,184.44 920.63,224.04 939.66,224.04 ; v2(921.66,343.44) 939.66,325.44 939.66,224.04 ; v2(974.56,-14.56) 945.39,6.34 945.39,202.71 942.66,205.44 939.66,205.44 939.66,224.04
  Bottom Layer w12: R3.1@49.19,769.44 R1.1@49.19,682.44 49.98,682.44 C15.2@49.98,631.44 ; U2.8@372.93,689.74 394.63,688.71 441.69,735.76 C1.2@442.98,736.44 ; R13.1@441.56,683.05 442.19,736.44 C1.2@442.98,736.44 ; C27.2@587.35,736.44 587.35,763.44 603.66,779.76 v2(603.66,781.44) 560.5,781.44 548.5,793.44 R2.2@483.13,793.44 483.13,789.72 462.66,769.25 462.66,760.03 442.98,740.34 C1.2@442.98,736.44 ; R9.1@595.19,376.44 595.19,369.84 551.35,369.84 C14.2@551.35,376.44 551.35,378.41 574.54,401.61 574.54,415.18 v1(598.31,438.95) ; C28.2@701.35,22.44 701.35,12.7 v1(721.47,-5.47) ; C26.2@902.35,316.44 902.35,316.61 v2(921.66,343.44) ; C24.2@949.98,472.44 927.66,472.44 v2(894.66,505.44) 906.66,517.44 C29.2@949.98,523.53 ; v2(1012.03,840.21) 1041.3,840.21 1062.64,861.55 1128.63,861.55 C34.2@1128.63,885.63 ; v2(1028.98,859.8) 1046.58,877.4 C34.2@1139.79,877.4 1130.48,885.63 C34.2@1128.63,885.63 ; R15.1@1055.6,737.07 1104.66,737.07 ; 1083.66,715.44 1083.66,703.44 1095.18,691.93 U4.9@1112.11,691.93 ; R59.2@1087.37,18.62 1091.04,18.62 T7.1@1144.31,-34.65 ; 1104.66,721.44 1104.66,711.61 U4.10@1112.11,711.61 ; 1104.66,743.43 1051.18,796.91 C67.2@1050.57,796.91 1143.66,823.44 ; v3(1104.66,814.44) 1150.98,814.44 1150.98,815.6 ; C34.2@1143.66,880.44 1138.47,885.63 C34.2@1128.63,885.63 ; R14.1@1338.13,697.44 1338.13,697.6 1364.63,697.6 v1(1364.63,699.21)
  Bottom Layer w19.68: v1(818.9,220.47) 823.58,196.94 829.98,190.54 C23.2@829.98,181.44 ; 1104.66,721.44 1104.66,737.07 1104.66,743.43 1104.66,749.41 1122.67,767.42 1122.67,772.27 ; 1104.66,772.27 1104.66,769.01 1104.66,769.28 1150.98,815.6 ; 1143.66,823.44 C34.2@1143.66,880.44
  Bottom Layer w21.65: v1(49.98,592.44) C15.2@49.98,631.44
  Bottom Layer w27.56: 1083.66,715.44 1083.66,760.82 1095.12,772.27 1104.66,772.27 1122.67,772.27 1134.84,772.27 C17.2@1159.47,796.91
  other v2: 219.66,-16.56
5V0: C7.2 C32.1 C36.1 C37.2 C39.2 C40.1 C43.2 C52.2 C53.2 C54.2 J1.1 J5.1 J5.2 J5.3 J6.1 J6.2 J6.3 R5.1 U1.E10 U1.E11 U4.1 U4.2 U4.4 U4.5 | length 2519.6
  Top Layer w5.6: v1(253.62,726.64) 248.68,723.35 249.66,721.44 249.66,700.44 C54.2@265.98,700.44 276.66,700.44 276.66,711.13 ; J1.1@858.27,879.92 869.34,879.92 v2(869.34,822.83) ; U1.E11@866.14,425.2 876.66,425.2 890.16,438.69 890.91,439.44 ; C40.1@972.39,501.69 972.39,456.35 C7.2@970.98,457.44 C7.2@973.17,454.38 ; J5.3@1202.39,275.59 1202.39,265.44 v1(1230.66,265.44)
  Top Layer w8: J6.3@214.93,669.29 240.66,669.29
  Top Layer w10: 890.91,439.44 958.23,439.44 C7.2@973.17,454.38
  Top Layer w12: J6.2@214.93,685.04 227.94,685.04 243.35,700.44 249.66,700.44 ; J6.1@214.93,700.79 265.63,700.79 C54.2@265.98,700.44 276.66,711.13 v2(276.66,739.44) ; 240.66,669.29 246.13,669.29 C53.2@265.98,649.44 ; 265.98,730.44 267.66,730.44 v2(276.66,739.44) ; v2(276.66,766.44) v2(276.66,739.44) ; v1(851.37,440.94) U1.E11@866.14,425.2 v1(881.89,440.94) 884.14,438.69 890.16,438.69 ; J1.1@858.27,879.92 858.27,832.27 v2(895.31,832.27) ; 890.91,439.44 953.16,501.69 C40.1@972.39,501.69 ; v1(903.66,442.44) 918.66,457.44 C7.2@970.98,457.44 ; R5.1@1075.38,901.9 1080.78,901.9 v2(1080.78,939.13) ; v4(1175.44,250.37) 1172.68,253.12 1172.68,259.84 J5.2@1202.39,259.84 ; J5.1@1202.39,244.09 v1(1230.66,244.09)
  Top Layer w13.78: U1.E10@834.65,425.2 v1(851.37,440.94)
  Top Layer w20: C53.2@265.98,649.44 265.98,730.44
  Mid-Layer 3 w15: 1022.21,440.94 1176.7,595.44 v4(1263.66,595.44)
  Mid-Layer 3 w17.72: v1(851.37,440.94) 1022.21,440.94
  Bottom Layer w5.6: C43.2@841.38,867.43 848.47,868.44 848.47,864.52 863.06,864.52 v2(895.31,832.27) ; v4(1275.66,757.44) C37.2@1297.7,754.67
  Bottom Layer w12: C43.2@841.38,867.43 848.47,853.86 v2(880.47,853.86) ; C43.2@848.47,868.44 848.47,843.69 v2(869.34,822.83) ; v4(1175.44,250.37) 1206.66,250.37 ; v3(1206.66,265.44) 1206.66,250.37 ; U4.4@1230.22,652.56 1266.29,652.56 C32.1@1287.29,631.56 ; U4.2@1230.22,691.93 1230.22,691.85 1239.15,691.85 1294.38,747.07 1294.38,745.44 C37.2@1297.7,754.67 1264.05,745.44 U4.1@1230.22,711.61 1230.66,712.06 1230.66,726.13 C36.1@1297.7,802.67 ; v1(1230.66,265.44) 1266.18,278.9 C52.2@1278.99,283.74 C39.2@1278.99,235.6 1239.43,235.6 1224.66,250.37 1206.66,250.37 ; v4(1263.66,595.44) 1263.29,595.81 1287.67,620.19 C32.1@1287.67,625.44 ; C32.1@1287.29,625.98 1287.67,628.44 C32.1@1287.67,628.19 ; C32.1@1287.29,632.87 C32.1@1287.29,631.56 ; v2(1287.66,586.44) C32.1@1287.66,625.44 ; C32.1@1287.29,631.56 1287.29,628.56 C32.1@1287.67,628.19 ; C32.1@1287.67,625.44 C32.1@1287.67,628.19
  Bottom Layer w23.62: U4.5@1230.22,632.87 C32.1@1287.29,632.87
  other v2: 1266.66,733.44
AD0: T4.1 U1.K7 U9.4 | length 301.9
  Top Layer w5.6: U9.4@704.02,88.58 767.6,88.58 cw(c767.6,78.78) 774.53,85.71 783.66,76.58 T4.1@783.66,76.44 ; U1.K7@740.16,267.72 v1(753.61,252.76)
  Bottom Layer w5.6: v1(753.61,252.76) 743.44,242.59 ccw(c750.37,235.66) 740.57,235.66 740.57,208.39 ccw(c750.37,208.39) 743.44,201.46 762.93,181.97 cw(c756,175.04) 765.8,175.04 765.8,125.18 ccw(c775.6,125.18) 768.67,118.25 780.79,106.13 cw(c773.86,99.2) 783.66,99.2 T4.1@783.66,76.44
ADDR_CTL: J5.11 U1.D1 | length 1195.1
  Top Layer w5.6: v1(495.66,598.44) 495.66,516.21 ccw(c505.46,516.21) 498.54,509.28 U1.D1@551.18,456.69 ; J5.11@1202.39,401.57 1223.6,401.57 ccw(c1223.6,411.37) 1230.53,404.45 1269.79,443.7 ccw(c1262.86,450.63) 1272.66,450.63 1272.66,506.14 ccw(c1262.86,506.14) 1269.79,513.07 1268.29,514.57 cw(c1275.22,521.5) 1265.42,521.5 1265.42,559.44 v1(1266.66,559.44)
  Mid-Layer 1 w5.6: v1(495.66,598.44) 590.53,598.44 ccw(c590.53,608.24) 597.46,601.31 642.72,646.57 cw(c649.65,639.64) 649.65,649.44 800.6,649.44 cw(c800.6,639.64) 807.53,646.57 843.79,610.31 ccw(c850.72,617.24) 850.72,607.44 1028.6,607.44 cw(c1028.6,597.64) 1035.53,604.57 1068.79,571.31 ccw(c1075.72,578.24) 1075.72,568.44 1253.6,568.44 cw(c1253.6,558.64) 1260.53,565.57 v1(1266.66,559.44)
ADDR_CTL_0: J6.11 R30.1 | length 107.1
  Top Layer w5.6: J6.11@214.93,543.31 230.96,543.31 cw(c230.96,533.51) 237.89,540.44 245.24,533.08 ccw(c252.17,540.01) 252.17,530.21 297.9,530.21 ccw(c297.9,540.01) 304.83,533.08 R30.1@313.19,541.44
CAMPWR_EN: J5.10 J6.10 U1.D3 | length 1550.8
  Top Layer w5.6: J6.10@214.93,559.06 233.96,559.06 ; v1(280.61,549.79) 251.34,549.79 ; v1(597.23,471.43) U1.D3@614.17,456.69 ; J5.10@1202.39,385.83 1226.99,385.83 ccw(c1226.99,395.63) 1233.92,388.7 1283.48,438.26 ccw(c1276.55,445.19) 1286.35,445.19 v1(1286.35,534.1) ; 233.96,559.06 cw(c233.96,549.26) 240.89,556.18 ; 233.96,559.06 cw(c233.96,549.26) 240.89,556.18 ; 240.89,556.18 244.41,552.66 ; 244.41,552.66 ccw(c251.34,559.59) 251.34,549.79 ; 244.41,552.66 ccw(c251.34,559.59) 251.34,549.79
  Mid-Layer 1 w5.6: v1(280.61,549.79) 311.39,580.57 ; v1(597.23,471.43) 586.38,482.28 cw(c593.31,489.21) 583.51,489.21 583.51,542.62 ; v1(1286.35,534.1) 1286.54,534.78 1282.95,535.78 ccw(c1280.33,526.34) 1280.33,536.14 1265.99,536.14 cw(c1265.99,545.94) 1259.06,539.01 1247.49,550.57 ccw(c1240.56,543.64) 1240.56,553.44 1063.72,553.44 cw(c1063.72,563.24) 1056.79,556.31 1023.53,589.57 ccw(c1016.6,582.64) 1016.6,592.44 844.72,592.44 cw(c844.72,602.24) 837.79,595.31 801.53,631.57 ccw(c794.6,624.64) 794.6,634.44 659.28,634.44 ccw(c659.28,624.64) 652.35,631.57 586.38,565.6 ccw(c593.31,558.67) 583.51,558.67 583.51,542.62 ; 311.39,580.57 cw(c318.32,573.64) 318.32,583.44 ; 311.39,580.57 cw(c318.32,573.64) 318.32,583.44 ; 318.32,583.44 362.6,583.44 ; 362.6,583.44 cw(c362.6,573.64) 369.53,580.57 ; 362.6,583.44 cw(c362.6,573.64) 369.53,580.57 ; 369.53,580.57 384.79,565.31 ; 384.79,565.31 ccw(c391.72,572.24) 391.72,562.44 ; 384.79,565.31 ccw(c391.72,572.24) 391.72,562.44 ; 391.72,562.44 572.6,562.44 ; 572.6,562.44 cw(c572.6,552.64) 579.53,559.57 ; 572.6,562.44 cw(c572.6,552.64) 579.53,559.57 ; 579.53,559.57 580.64,558.46 ; 580.64,558.46 cw(c573.71,551.53) 583.51,551.53 ; 580.64,558.46 cw(c573.71,551.53) 583.51,551.53 ; 583.51,542.62 583.51,551.53
CLK32K768: R27.1 U1.D6 | length 381.4
  Top Layer w5.6: U1.D6@708.66,456.69 v1(724.41,472.44) ; v1(1002.66,562.44) 1018.17,577.95 1018.17,588.2 R27.1@1019.01,589.04
  Mid-Layer 1 w5.6: v1(724.41,472.44) 737.78,485.81 cw(c744.71,478.88) 744.71,488.68 758.57,488.68 ccw(c758.57,498.48) 765.5,491.55 769.64,495.69 ccw(c762.71,502.62) 772.51,502.62 772.51,506.48 cw(c782.31,506.48) 775.38,513.41 779.52,517.55 cw(c786.45,510.62) 786.45,520.42 799.95,520.42 cw(c799.95,510.62) 806.87,517.55 810.11,514.31 ccw(c817.04,521.24) 817.04,511.44 845.6,511.44 ccw(c845.6,521.24) 852.53,514.31 864.79,526.57 cw(c871.72,519.64) 871.72,529.44 965.6,529.44 ccw(c965.6,539.24) 972.53,532.31 v1(1002.66,562.44)
CMOS_D0: J5.30 U1.F10 | length 923
  Top Layer w5.6: U1.F10@834.65,393.7 v1(850.39,407.49) ; J5.30@1202.39,700.79 1307.6,700.79 cw(c1307.6,690.99) 1314.53,697.92 1377.79,634.66 cw(c1370.86,627.73) 1380.66,627.73 1380.66,530.5 cw(c1370.86,530.5) 1377.79,523.57 1372.19,517.97 1372.19,515.53 v1(1368.69,515.53)
  Mid-Layer 2 w5.6: v1(850.39,407.49) 864.74,421.84 cw(c871.67,414.91) 871.67,424.71 926.34,424.71 cw(c926.34,414.91) 933.26,421.84 942.79,412.31 ccw(c949.72,419.24) 949.72,409.44 1218.67,409.44 ccw(c1218.67,419.24) 1225.6,412.31 1303.09,489.8 cw(c1310.02,482.87) 1310.02,492.67 1341.78,492.67 ccw(c1341.78,502.47) 1348.71,495.55 v1(1368.69,515.53)
CMOS_D1: J5.29 U1.F9 | length 930.9
  Top Layer w5.6: U1.F9@803.15,393.7 v1(818.9,408.47) ; J5.29@1202.39,685.04 1301.6,685.04 cw(c1301.6,675.24) 1308.53,682.17 1362.79,627.91 cw(c1355.86,620.98) 1365.66,620.98 1365.66,548.5 cw(c1355.86,548.5) 1362.79,541.57 1345.23,524.01 v1(1345.23,523.28)
  Mid-Layer 2 w5.6: v1(818.9,408.47) 832.26,421.84 ccw(c825.33,428.77) 835.13,428.77 835.13,445.67 cw(c844.93,445.67) 838.01,452.6 841.21,455.81 cw(c848.14,448.88) 848.14,458.68 941.08,458.68 cw(c941.08,448.88) 948.01,455.81 974.88,428.93 ccw(c981.81,435.86) 981.81,426.06 1212.5,426.06 ccw(c1212.5,435.86) 1219.43,428.93 1296.42,505.92 cw(c1303.35,498.99) 1303.35,508.79 1326.68,508.79 ccw(c1326.68,518.59) 1333.61,511.66 v1(1345.23,523.28)
CMOS_D2: J5.28 U1.F7 | length 921.4
  Top Layer w5.6: U1.F7@740.16,393.7 v1(755.91,409.45) ; J5.28@1202.39,669.29 1295.6,669.29 cw(c1295.6,659.49) 1302.53,666.42 1344.79,624.16 cw(c1337.86,617.23) 1347.66,617.23 1347.66,556.58 1344.81,553.73 v1(1344.81,550.09)
  Mid-Layer 1 w5.6: v1(755.91,409.45) 774.04,391.31 ccw(c780.97,398.24) 780.97,388.44 1124.6,388.44 ccw(c1124.6,398.24) 1131.53,391.31 1200.34,460.12 cw(c1207.27,453.19) 1207.27,462.99 1242.74,462.99 ccw(c1242.74,472.79) 1249.67,465.86 1331.03,547.22 cw(c1337.96,540.29) 1337.96,550.09 v1(1344.81,550.09)
CMOS_D3: J5.27 U1.G10 | length 865.9
  Top Layer w5.6: U1.G10@834.65,362.2 v1(850.39,347.15) ; J5.27@1202.39,653.54 1286.6,653.54 cw(c1286.6,643.74) 1293.53,650.67 1329.79,614.41 cw(c1322.86,607.48) 1332.66,607.48 1332.66,575.5 cw(c1322.86,575.5) 1329.79,568.57 1326.53,565.31 ccw(c1333.46,558.38) 1323.66,558.38 1323.66,490.44 1323.66,425.73 v1(1325.87,423.52)
  Mid-Layer 2 w5.6: v1(850.39,347.15) 870.81,367.57 cw(c877.74,360.64) 877.74,370.44 956.6,370.44 ccw(c956.6,380.24) 963.53,373.31 966.79,376.57 cw(c973.72,369.64) 973.72,379.44 1277.74,379.44 ccw(c1277.74,389.24) 1284.67,382.31 v1(1325.87,423.52)